# EAGLE board BeatLights (EAGLE 6.3)
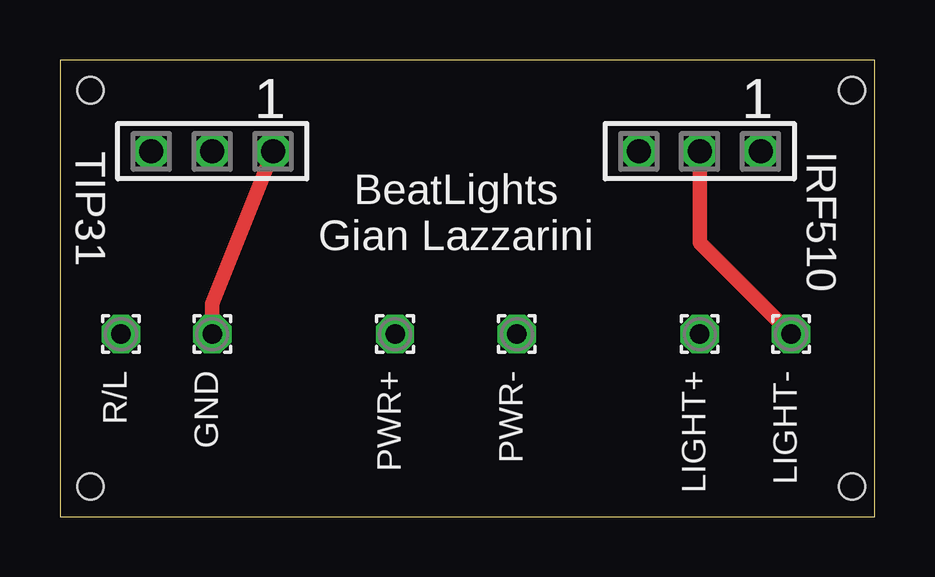
[diagram p0: board, top side]
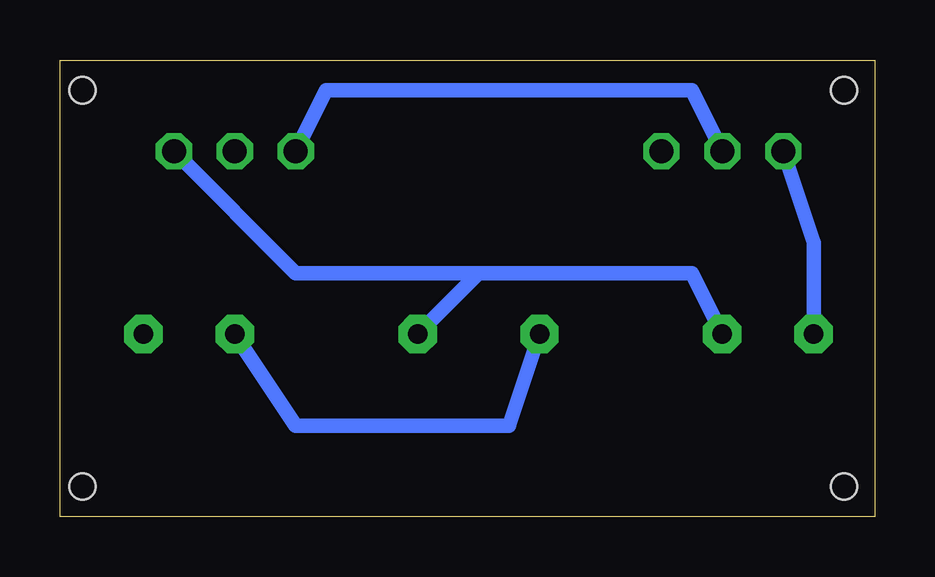
[diagram p1: board, bottom side, seen from below]

Size 33.96 x 19.04 mm. Coordinates in mm from the lower left corner, seen from the top.
Outline: 0,0 33.96,0 33.96,19.04 0,19.04 0,0
Copper layers (1*16): Top 0.035mm / dielectric 1.5mm / Bottom 0.035mm
Design rules "default": minimum track width 10mil, minimum drill 24mil, track to track 8mil, track to pad 8mil, pad to pad 8mil, via to via 8mil, smd to smd 8mil, copper to edge 40mil, drill to drill 8mil, minimum pad ring 10mil, minimum via ring 8mil, stop-mask expansion 4mil, vias tented up to drill 0mil, thermal gap 10mil
Holes 1.1 mm at 1.27,1.27 1.27,17.78 33.02,1.27 33.02,17.78

## Footprints (pad centres in the part's own frame; a part is rotated, then mirrored left to right if it is on the bottom)
1,6/0,8 = drill 0.813 pad 1.6 octagon: 1 0,0
SSW-103-02-S-S = drill 1 pad 1.5 octagon: 1 -2.54,0; 2 0,0; 3 2.54,0

## Placement (x,y rotation side)
GND  [1,6/0,8]  6.35,7.62 0 top
IRF510  SSW-103-02-S-S  [SSW-103-02-S-S]  26.67,15.24 180 top
LIGHT+  [1,6/0,8]  26.67,7.62 0 top
LIGHT-  [1,6/0,8]  30.48,7.62 0 top
PWR+  [1,6/0,8]  13.97,7.62 0 top
PWR-  [1,6/0,8]  19.05,7.62 0 top
R/L  [1,6/0,8]  2.54,7.62 0 top
TIP31  Tip31  [SSW-103-02-S-S]  6.35,15.24 180 top

## Library data of the parts
GND LIGHT+ LIGHT- PWR+ PWR- R/L = wirepad
IRF510 TIP31 = con-samtec; MPN: SSW-103-02-S-S; OC_FARNELL: unknown; OC_NEWARK: 11P9367

## Nets
N$1: R/L.1 TIP31.3
N$2: IRF510.3 TIP31.2
N$3: IRF510.2 LIGHT-.1
N$4: GND.1 IRF510.1 PWR-.1 TIP31.1
N$5: LIGHT+.1 PWR+.1

## Tracks (layer width: path | path; a pad name or v marks a point on that pad's centre or on a via)
N$1
  Bottom 0.61: TIP31.3 2.54,11.43 R/L.1
N$2
  Bottom 0.61: TIP31.2 7.62,17.78 22.86,17.78 IRF510.3
N$3
  Top 0.61: IRF510.2 26.67,11.43 LIGHT-.1
N$4
  Top 0.61: GND.1 6.35,8.89 TIP31.1
  Bottom 0.61: 16.51,10.16 PWR-.1 | 16.51,10.16 24.13,10.16 IRF510.1 | 16.51,10.16 7.62,10.16 GND.1
N$5
  Bottom 0.61: PWR+.1 15.24,3.81 24.13,3.81 LIGHT+.1

## Text on the board
tPlace: BeatLights / Gian Lazzarini